# EAGLE board lumiled_driver_ser (EAGLE 8.3.1)
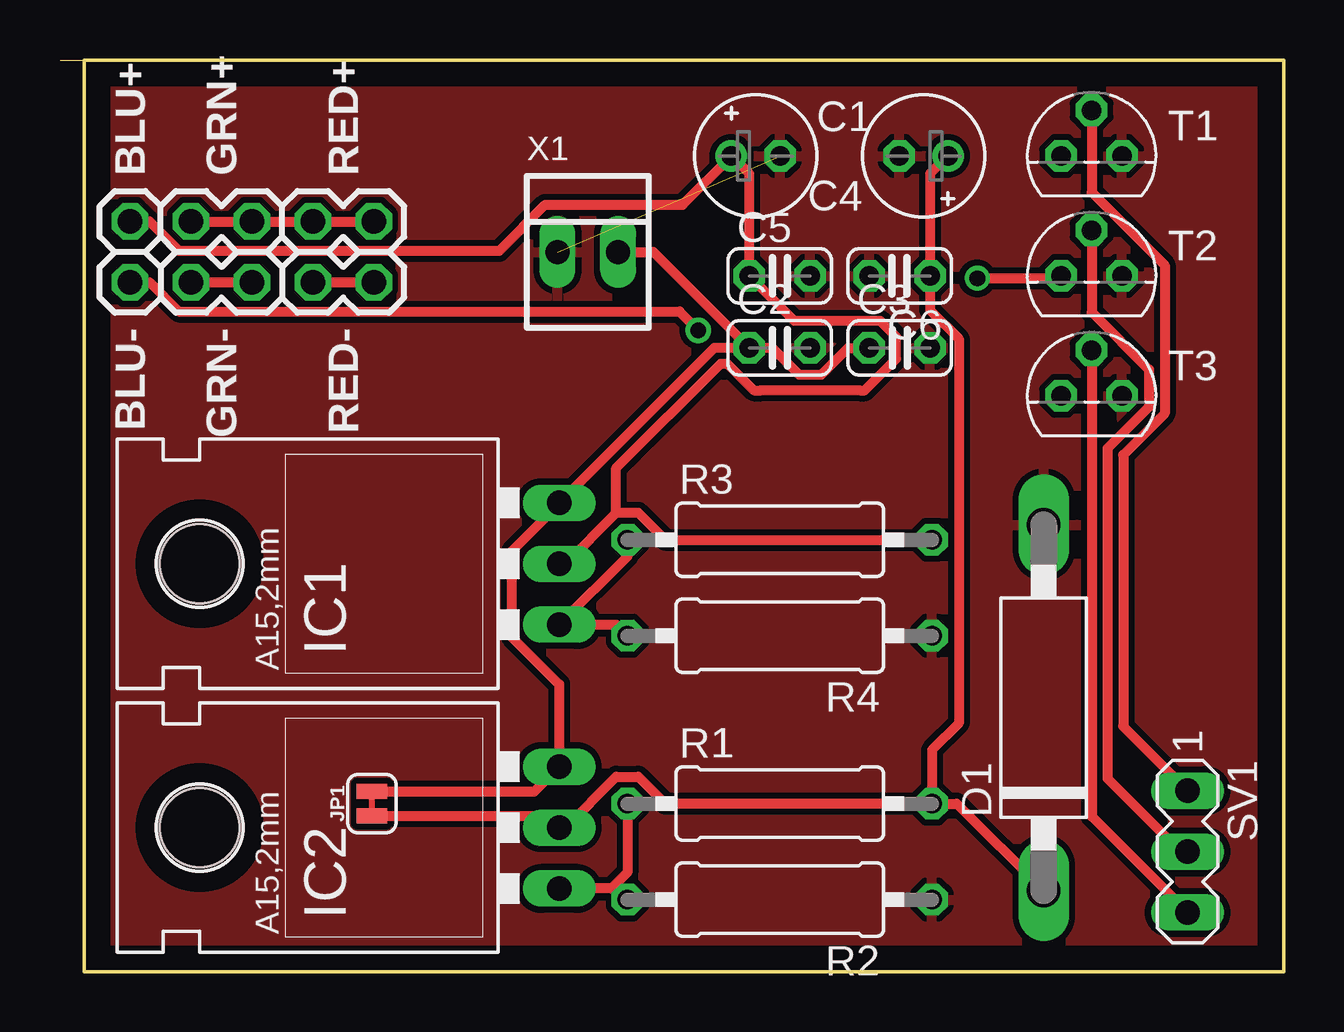
[diagram p0: board, top side]
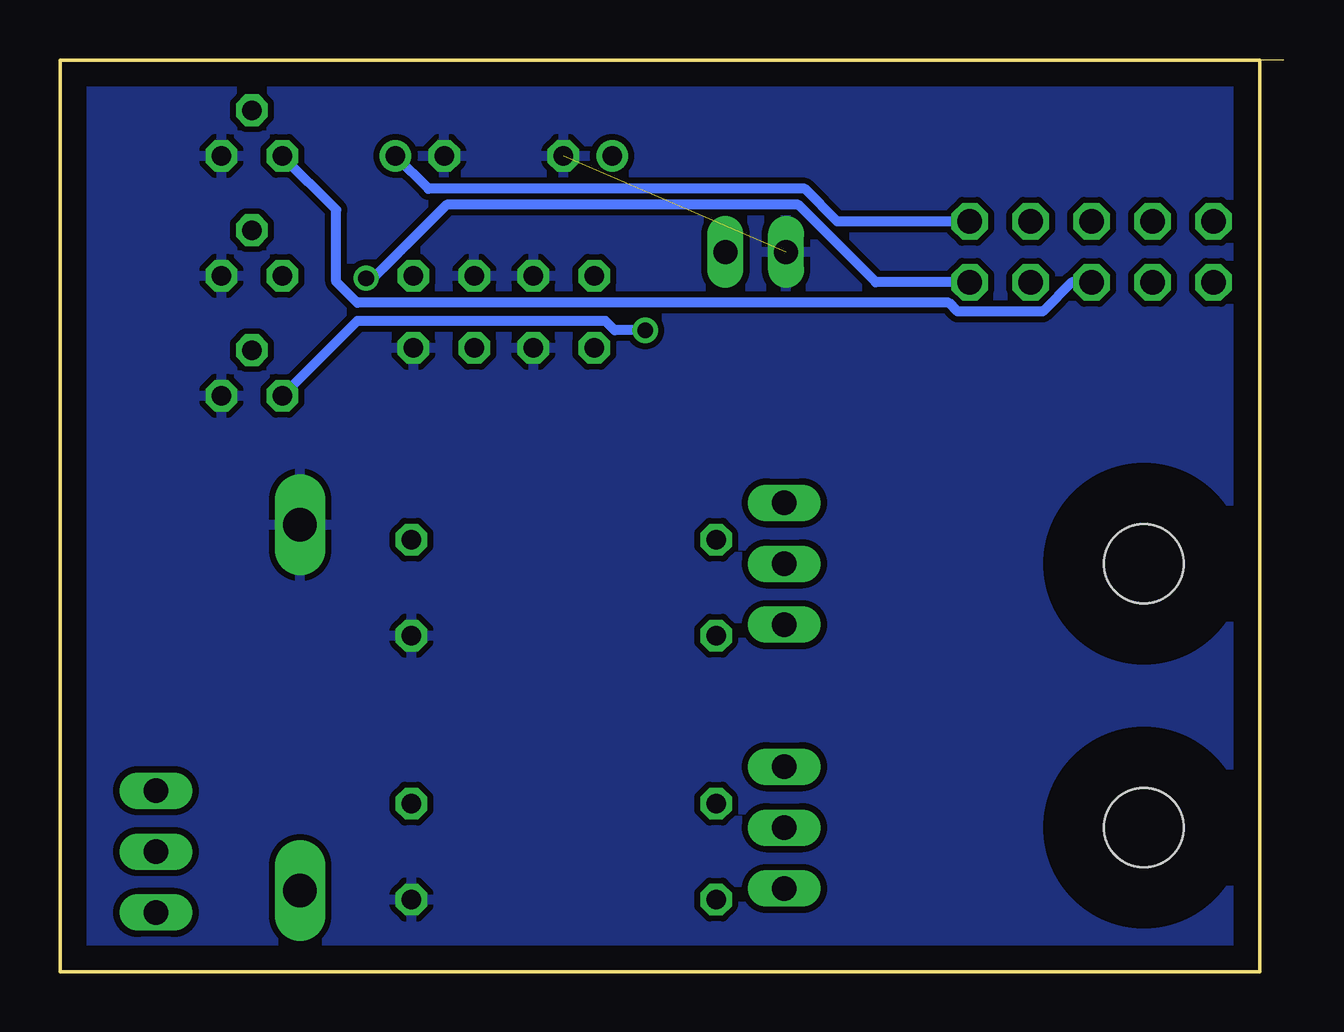
[diagram p1: board, bottom side, seen from below]

Size 51 x 38 mm. Coordinates in mm from the lower left corner, seen from the top.
Outline: 0,38 1,38
Outline: 1,38 51,38 51,0 1,0 1,38
Copper layers (1*16): Top 0.035mm / dielectric 1.5mm / Bottom 0.035mm
Design rules "default *": minimum track width 10mil, minimum drill 0.35mm, track to track 10mil, track to pad 10mil, pad to pad 10mil, via to via 10mil, smd to smd 0mil, copper to edge 40mil, drill to drill 6mil, minimum pad ring 10mil, minimum via ring 8mil, stop-mask expansion 4mil, vias tented up to drill 0mil, thermal gap 10mil

## Footprints (pad centres in the part's own frame; a part is rotated, then mirrored left to right if it is on the bottom)
E2-5 = drill 0.813 pad 1.27: + -1.016,0 | drill 0.813 pad 1.27 octagon: - 1.016,0
C025-024X044 = drill 0.813 octagon: 1 -1.27,0; 2 1.27,0
C1702-15 = drill 1.397 long: A 7.62,0; C -7.62,0
317TL = drill 1.016 long: 1 -2.54,-3.81; 2 0,-3.81; 3 2.54,-3.81 | hole 3.302: 0,11.176
SMT-JUMPER_2_NC_TRACE_SILK = smd 0.635 x 1.27: 1 -0.508,0; 2 0.508,0
0309/12 = drill 0.813 octagon: 1 -6.35,0; 2 6.35,0
MA03-1 = drill 1.016 long: 1 -2.54,0; 2 0,0; 3 2.54,0
TO92 = drill 0.813 octagon: 1 1.27,0; 2 0,1.905; 3 -1.27,0
MA05-2 = drill 1.016 octagon: 1 -5.08,-1.27; 2 -5.08,1.27; 3 -2.54,-1.27; 4 -2.54,1.27; 5 0,-1.27; 6 0,1.27; 7 2.54,-1.27; 8 2.54,1.27; 9 5.08,-1.27; 10 5.08,1.27
22-23-2021 = drill 1 long: 1 -1.27,0; 2 1.27,0

## Placement (x,y rotation side)
C1  10uF  [E2-5]  29,34 0 top
C2  1uF  [C025-024X044]  30,26 0 top
C3  100nF  [C025-024X044]  35,26 0 top
C4  10uF  [E2-5]  36,34 180 top
C5  100nF  [C025-024X044]  30,29 0 top
C6  100nF  [C025-024X044]  35,29 180 top
D1  [C1702-15]  41,11 90 top
IC1  [317TL]  17,17 90 top
IC2  [317TL]  17,6 90 top
JP1  12V BYPASS  [SMT-JUMPER_2_NC_TRACE_SILK]  13,7 90 top
R1  [0309/12]  30,7 0 top
R2  [0309/12]  30,3 180 top
R3  [0309/12]  30,18 0 top
R4  [0309/12]  30,14 180 top
SV1  [MA03-1]  47,5 270 top
T1  [TO92]  43,34 0 top
T2  [TO92]  43,29 0 top
T3  [TO92]  43,24 0 top
U$1  LUMILED_5LED  [MA05-2]  8,30 180 top
X1  PWR  [22-23-2021]  22,30 0 top

## Library data of the parts
C1-C6 = rcl
D1 = diode
IC1 IC2 = v-reg
JP1 = SparkFun-Jumpers
R1-R4 = resistor
SV1 = con-lstb; OC_FARNELL: unknown; OC_NEWARK: unknown
T1-T3 = transistor
U$1 = lumiled_led
X1 = con-molex; MF: MOLEX; MPN: 22-23-2021; OC_FARNELL: 1462926; OC_NEWARK: 25C3832

## Nets
+VIN: C2.1 C3.1 IC1.3 IC2.3 JP1.2 X1.2
BLU_PWM: SV1.3 T3.2
GND: C1.- C2.2 C3.2 C4.- C5.2 C6.2 D1.A R2.1 R4.1 T1.1 T2.1 T3.1 X1.1
GRN_PWM: SV1.1 T1.2
N$1: T1.3 U$1.6 U$1.8
N$2: T2.3 U$1.2 U$1.4
N$3: T3.3 U$1.10
N$4: C1.+ C5.1 IC1.2 R3.2 U$1.9
N$6: C4.+ C6.1 D1.C IC2.2 JP1.1 R1.2 U$1.1 U$1.3 U$1.5 U$1.7
N$7: IC2.1 R1.1 R2.2
N$8: IC1.1 R3.1 R4.2
RED_PWM: SV1.2 T2.2

## Tracks (layer width: path | path; a pad name or v marks a point on that pad's centre or on a via)
+VIN
  Top 0.406: JP1.2 19.78,7.51 IC2.3 20.81,11.97 18.83,13.96 18.83,17.5 20.81,19.49 IC1.3 27.27,26 C2.1 | C2.1 29.69,26 30.81,24.88 31.73,24.88 32.85,26 C3.1 | X1.2 24.73,30 C2.1
BLU_PWM
  Top 0.406: T3.2 43,6.46 SV1.3
GND  (1 unrouted)
  pour Top: 1,0 51,0 51,38 1,38
  pour Bottom: 1,0 1,38 51,38 51,0
GRN_PWM
  Top 0.406: T1.2 43,32.49 46.05,29.44 46.05,23.26 44.32,21.54 44.32,10.22 SV1.1
N$1
  Top 0.406: U$1.8 U$1.6
  Bottom 0.406: U$1.6 8.82,28.73 10.04,27.51 13.59,27.51 13.96,27.88 38.61,27.88 39.48,28.75 39.48,31.75 T1.3
N$2  (via drill 0.65)
  Top 0.406: U$1.4 U$1.2 | v38.24,28.9 41.63,28.9 T2.3
  Bottom 0.406: U$1.2 16.99,28.73 20.23,31.96 34.88,31.96 37.95,28.9 v38.24,28.9
N$3  (via drill 0.65)
  Top 0.406: U$1.10 3.74,28.73 4.96,27.51 25.83,27.51 v26.61,26.73
  Bottom 0.406: v26.61,26.73 27.88,26.73 28.27,27.12 38.61,27.12 T3.3
N$4
  Top 0.406: 23.19,19.12 24.11,19.12 25.23,18 R3.2 | IC1.2 21.07,17 23.19,19.12 | U$1.9 3.74,31.27 4.96,30.05 18.31,30.05 20.23,31.96 25.95,31.96 C1.+ 28.73,33.25 C5.1 30.61,27.12 34.19,27.12 34.85,26.46 34.85,25.54 33.53,24.22 33.34,24.22 29.22,24.22 28.93,24.22 27.81,25.34 27.54,25.34 23.19,20.98 23.19,19.12
N$6
  Top 0.406: U$1.7 U$1.5 U$1.3 U$1.1 | JP1.1 20.32,6.49 IC2.2 21.07,6 23.19,8.12 24.11,8.12 25.23,7 R1.2 | R1.2 37.38,7 D1.C | 36.56,34 C4.+ 36.27,33.25 C6.1 36.27,27.58 37.47,26.38 37.47,10.35 36.35,9.23 R1.2
  Bottom 0.406: U$1.1 18.6,31.27 19.95,32.63 35.64,32.63 C4.+
N$7
  Top 0.406: 22.98,3.46 IC2.1 | 22.98,3.46 23.19,3.46 R2.2 | R1.1 23.65,4.12 22.98,3.46
N$8
  Top 0.406: R4.2 23.19,14.46 IC1.1 23.65,17.3 R3.1
RED_PWM
  Top 0.406: T2.2 43,27.49 45.39,25.1 45.39,23.54 43.66,21.81 43.66,8.04 46.68,5.03 46.98,5.03 SV1.2